# Altium PCB Pow_Dist_24_12_5v.PcbDoc
Units mm, origin at the board's own origin, x right, y up, seen from the top; angles counter-clockwise.
Board outline 255.4 x 262.89 mm, 2 copper layers (Top Layer, Bottom Layer); 118 components, 61 nets, 248 pads, 0 vias.
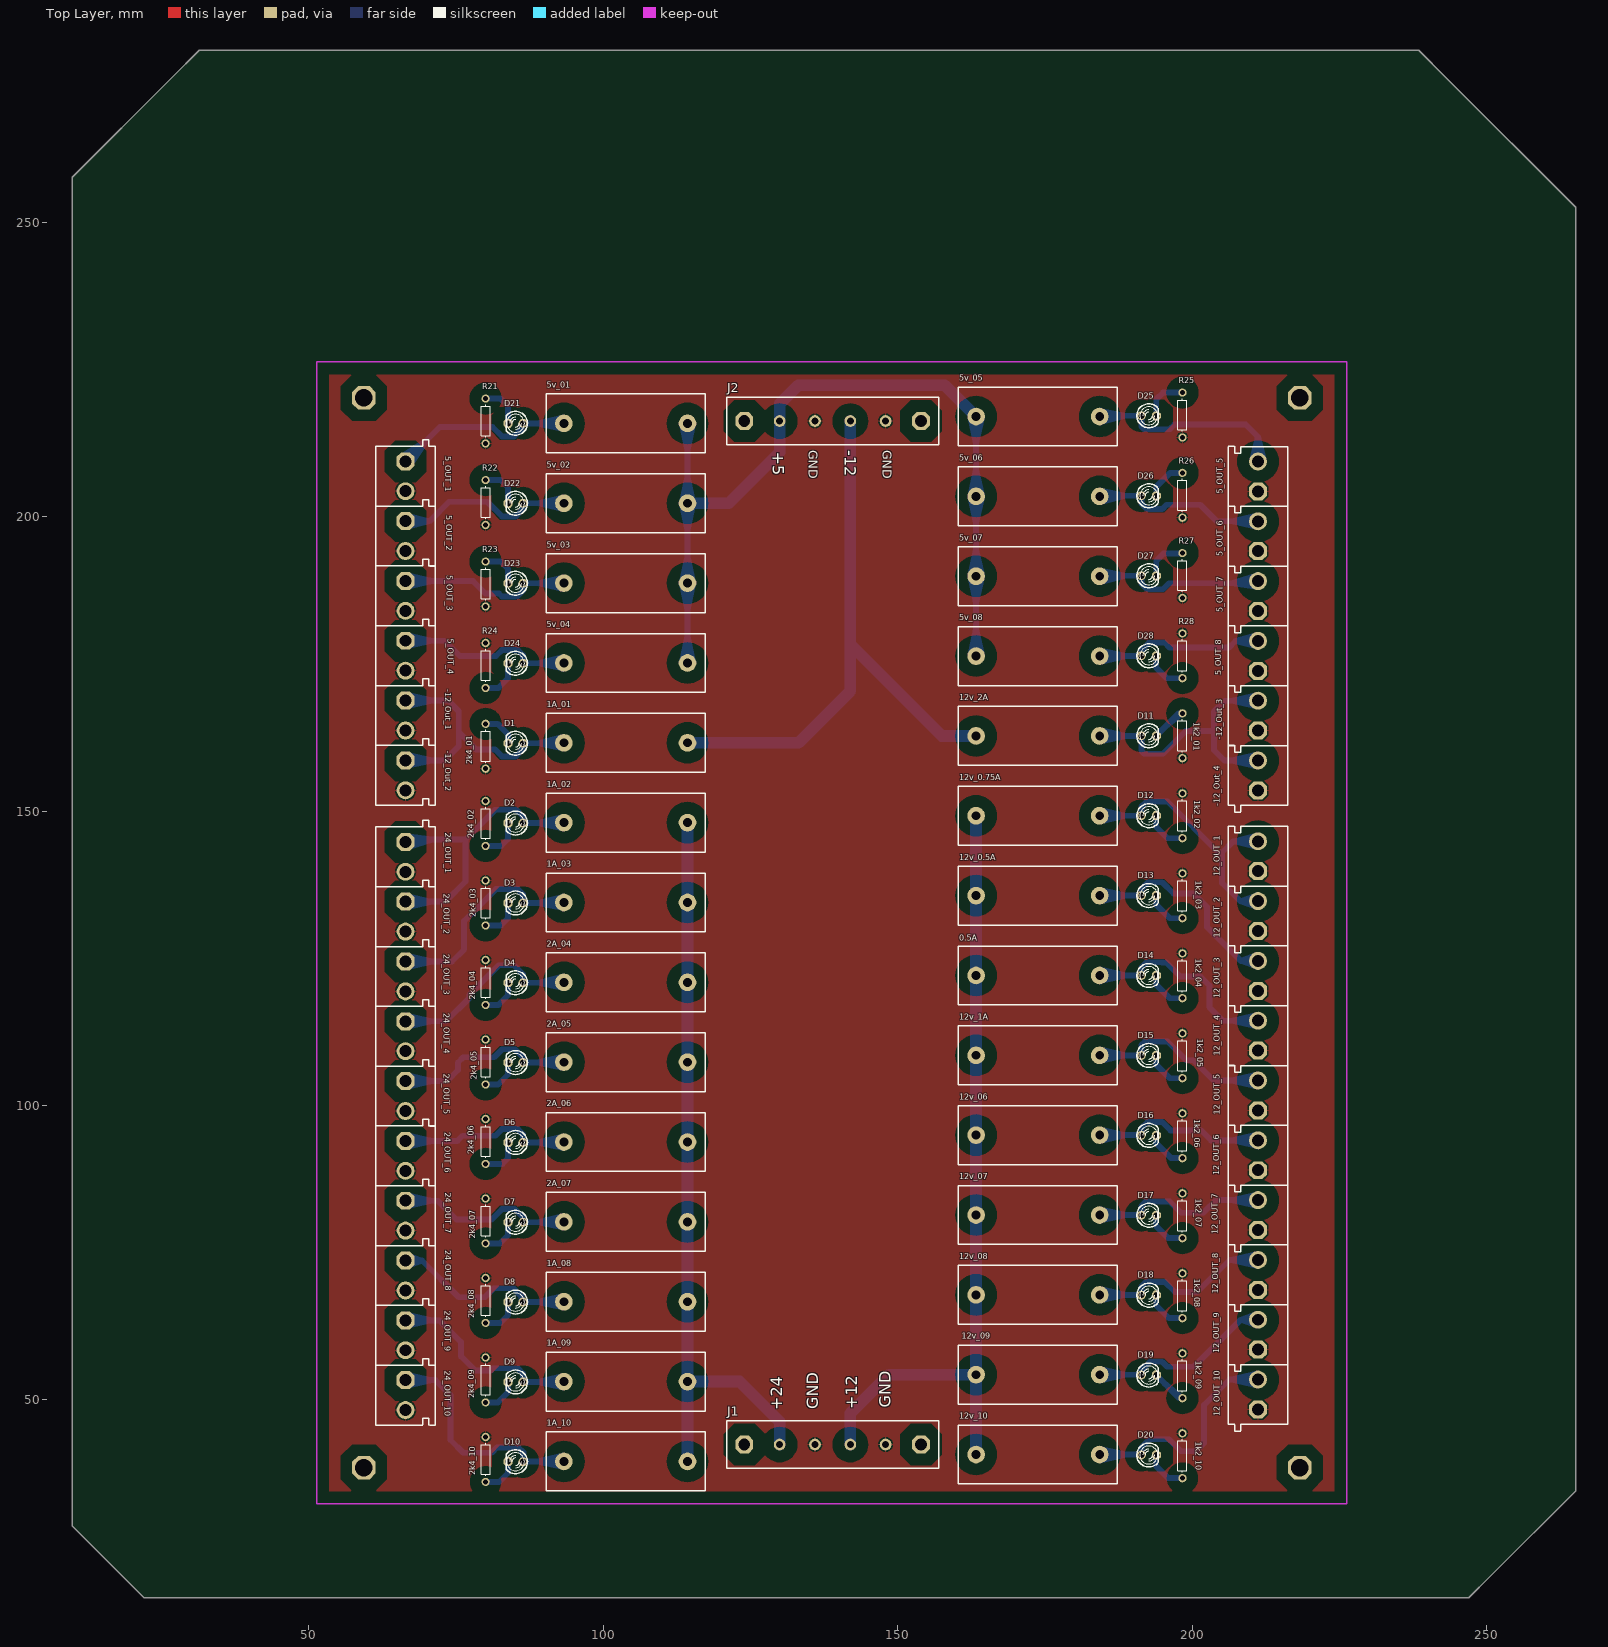
[diagram p0: Top Layer view]
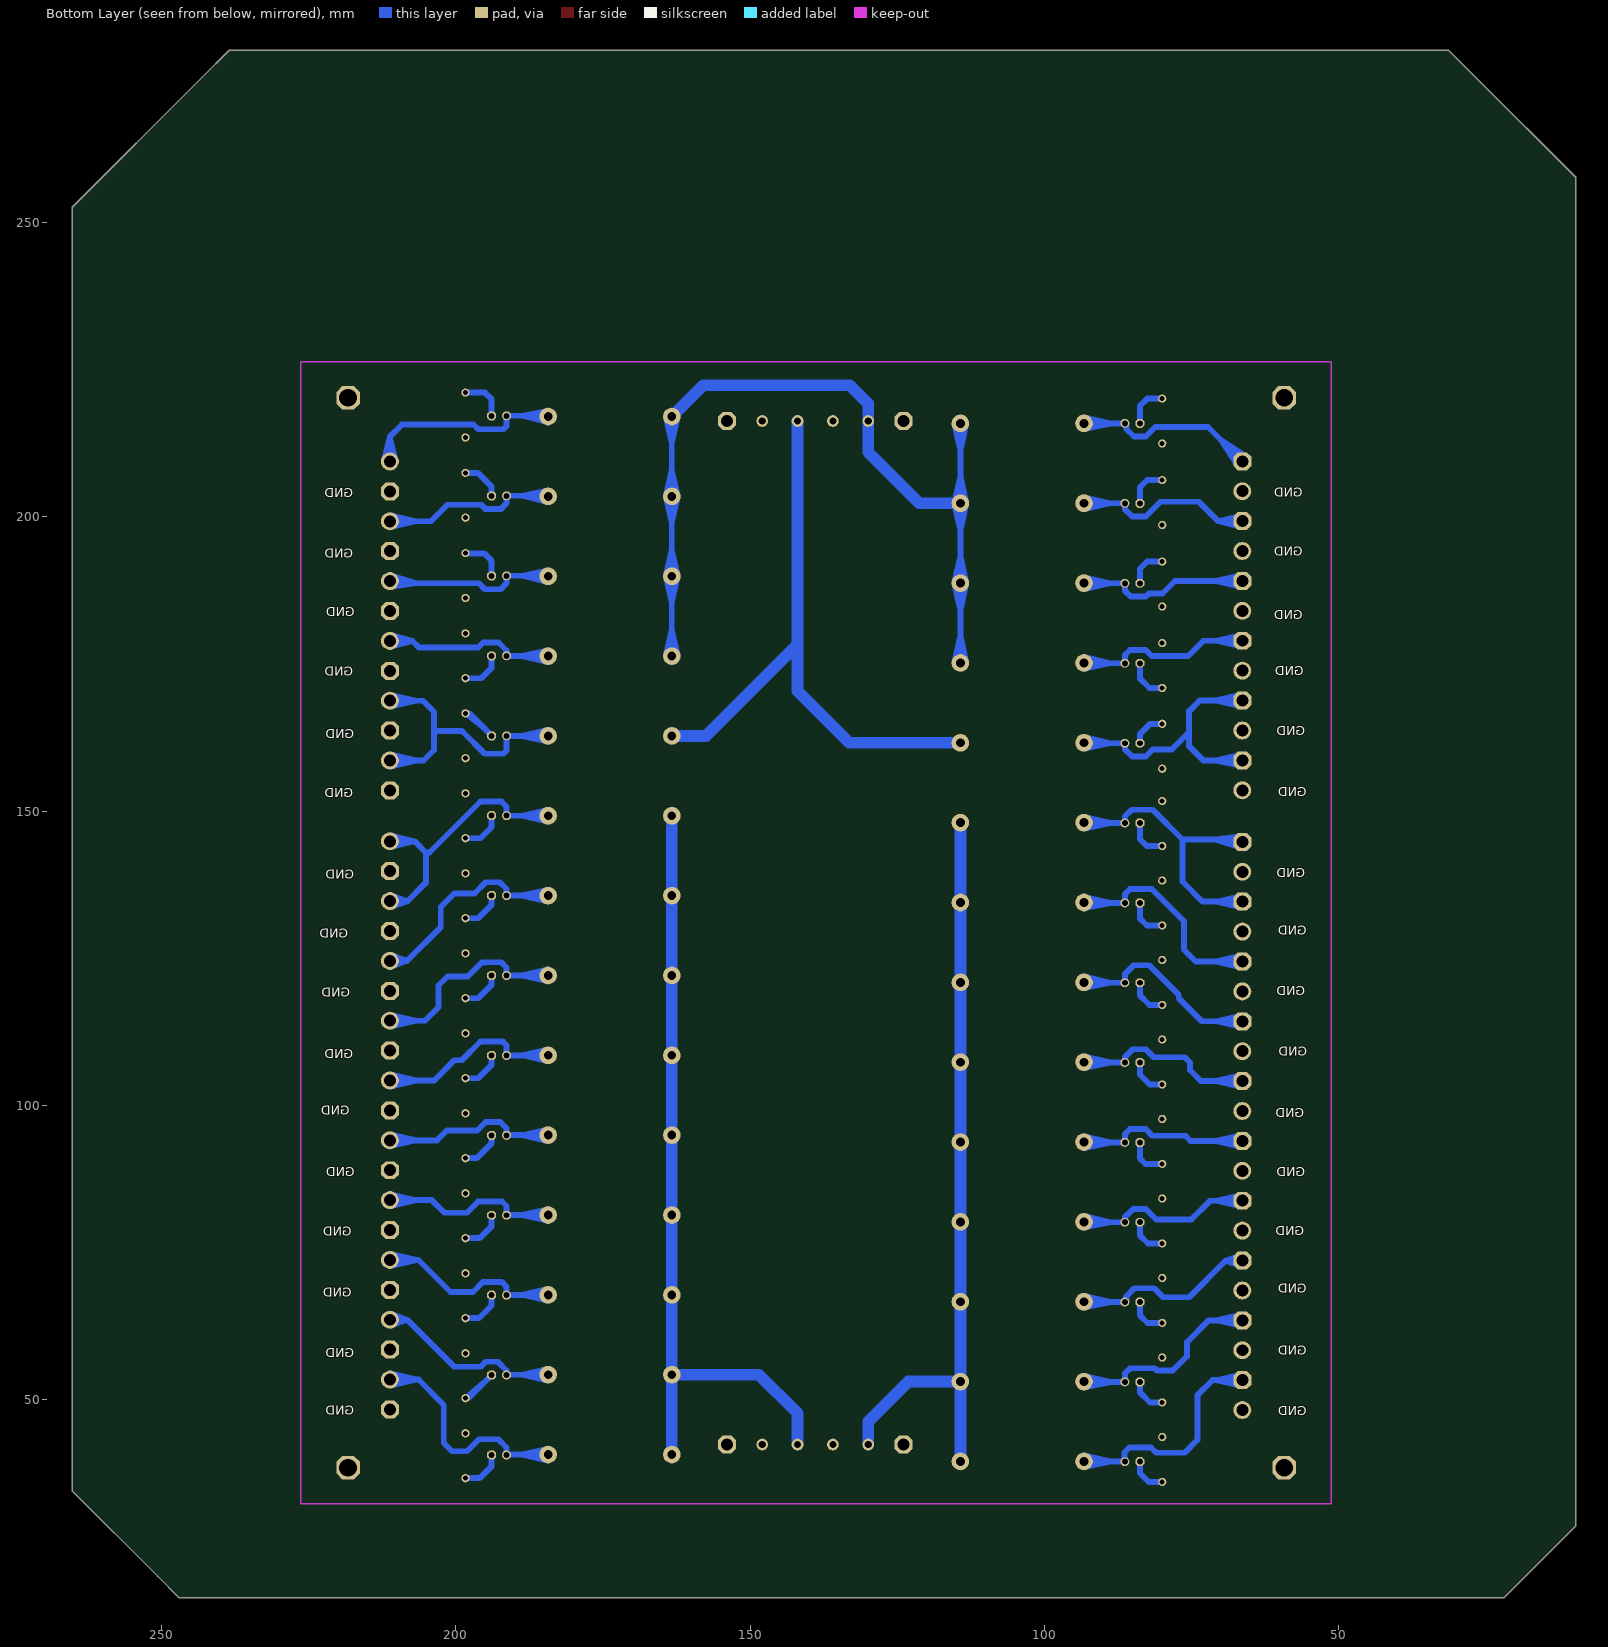
[diagram p1: Bottom Layer view, seen from below]

## Layer stack, top to bottom
Top Solder: solder mask 0.0102, Solder Resist, Dk 3.5
Top Layer: signal copper 0.0356
Dielectric 1: dielectric 0.32, FR-4, Dk 4.8
Bottom Layer: signal copper 0.0356
Bottom Solder: solder mask 0.0102, Solder Resist, Dk 3.5

## Board outline
21.971,16.383 9.779,28.575 9.779,33.147 9.779,257.683 26.67,274.574 31.369,279.273 223.139,279.273 238.506,279.273 243.205,274.574 265.176,252.603 265.176,59.817 265.176,34.544 250.698,20.066 247.015,16.383 22.86,16.383

## Design rules (kind name [scope] priority, off if disabled: settings)
Clearance [All] p1: gap=1
PolygonConnect [All] p1: connectstyle=Relief reliefconductorwidth=0.254 reliefentries=4 polygonreliefangle="90 Angle" airgapwidth=0.254
RoutingVias [All] p1: holewidth=0.711 width=1.27 viastyle="Through Hole" minholewidth=0.711 minwidth=1.27 maxholewidth=0.711 maxwidth=1.27
SolderMaskExpansion [All] p1: expansion=0.102
Width [All] p1: maxlimit=2 minlimit=1 preferedwidth=1 minimp=50.000000 maximp=50.000000 favimp=50.000000
29 further rules are at their usual default settings.

## Components (designator, comment, footprint, x,y, rotation, side; value= is the part's Value field where it differs from the comment)
0.5A "Fuse 2" PCBComponent_1 163.322,122.098 r0 top
1A_01 "Fuse 2" PCBComponent_1 114.3,161.621 r180 top
1A_02 "Fuse 2" PCBComponent_1 114.3,148.058 r180 top
1A_03 "Fuse 2" PCBComponent_1 114.3,134.494 r180 top
1A_08 "Fuse 2" PCBComponent_1 114.3,66.675 r180 top
1A_09 "Fuse 2" PCBComponent_1 114.3,53.111 r180 top
1A_10 "Fuse 2" PCBComponent_1 114.3,39.547 r180 top
1k2_01 "Res1" AXIAL-0.3 198.374,162.814 r270 top
1k2_02 "Res1" AXIAL-0.3 198.374,149.225 r90 top
1k2_03 "Res1" AXIAL-0.3 198.374,135.636 r90 top
1k2_04 "Res1" AXIAL-0.3 198.374,122.047 r90 top
1k2_05 "Res1" AXIAL-0.3 198.374,108.458 r90 top
1k2_06 "Res1" AXIAL-0.3 198.374,94.869 r90 top
1k2_07 "Res1" AXIAL-0.3 198.374,81.28 r90 top
1k2_08 "Res1" AXIAL-0.3 198.374,67.691 r90 top
1k2_09 "Res1" AXIAL-0.3 198.374,54.102 r90 top
1k2_10 "Res1" AXIAL-0.3 198.374,40.513 r90 top
2A_04 "Fuse 2" PCBComponent_1 114.3,120.93 r180 top
2A_05 "Fuse 2" PCBComponent_1 114.3,107.366 r180 top
2A_06 "Fuse 2" PCBComponent_1 114.3,93.803 r180 top
2A_07 "Fuse 2" PCBComponent_1 114.3,80.239 r180 top
2k4_01 "Res1" AXIAL-0.3 80.01,161.036 r270 top
2k4_02 "Res1" AXIAL-0.3 80.01,147.913 r90 top
2k4_03 "Res1" AXIAL-0.3 80.01,134.408 r90 top
2k4_04 "Res1" AXIAL-0.3 80.01,120.904 r90 top
2k4_05 "Res1" AXIAL-0.3 80.01,107.4 r90 top
2k4_06 "Res1" AXIAL-0.3 80.01,93.895 r90 top
2k4_07 "Res1" AXIAL-0.3 80.01,80.391 r90 top
2k4_08 "Res1" AXIAL-0.3 80.01,66.887 r90 top
2k4_09 "Res1" AXIAL-0.3 80.01,53.382 r90 top
2k4_10 "Res1" AXIAL-0.3 80.01,39.878 r90 top
5_OUT_1 "CON2 pin blue" My_CN2 71.501,211.963 r270 top
5_OUT_2 "CON2 pin blue" My_CN2 71.501,201.803 r270 top
5_OUT_3 "CON2 pin blue" My_CN2 71.501,191.643 r270 top
5_OUT_4 "CON2 pin blue" My_CN2 71.501,181.483 r270 top
5_OUT_5 "CON2 pin blue" My_CN2 206.121,201.803 r90 top
5_OUT_6 "CON2 pin blue" My_CN2 206.121,191.643 r90 top
5_OUT_7 "CON2 pin blue" My_CN2 206.121,181.483 r90 top
5_OUT_8 "CON2 pin blue" My_CN2 206.121,171.323 r90 top
5v_01 "Fuse 2" PCBComponent_1 114.3,215.877 r180 top
5v_02 "Fuse 2" PCBComponent_1 114.3,202.313 r180 top
5v_03 "Fuse 2" PCBComponent_1 114.3,188.749 r180 top
5v_04 "Fuse 2" PCBComponent_1 114.3,175.185 r180 top
5v_05 "Fuse 2" PCBComponent_1 163.322,217.045 r0 top
5v_06 "Fuse 2" PCBComponent_1 163.322,203.481 r0 top
5v_07 "Fuse 2" PCBComponent_1 163.322,189.917 r0 top
5v_08 "Fuse 2" PCBComponent_1 163.322,176.353 r0 top
12_OUT_1 "CON2 pin blue" My_CN2 206.121,137.287 r90 top
12_OUT_2 "CON2 pin blue" My_CN2 206.121,127.127 r90 top
12_OUT_3 "CON2 pin blue" My_CN2 206.121,116.967 r90 top
12_OUT_4 "CON2 pin blue" My_CN2 206.121,106.807 r90 top
12_OUT_5 "CON2 pin blue" My_CN2 206.121,96.647 r90 top
12_OUT_6 "CON2 pin blue" My_CN2 206.121,86.487 r90 top
12_OUT_7 "CON2 pin blue" My_CN2 206.121,76.327 r90 top
12_OUT_8 "CON2 pin blue" My_CN2 206.121,66.167 r90 top
12_OUT_9 "CON2 pin blue" My_CN2 206.121,56.007 r90 top
12_OUT_10 "CON2 pin blue" My_CN2 206.121,45.847 r90 top
12v_0.5A "Fuse 2" PCBComponent_1 163.322,135.662 r0 top
12v_0.75A "Fuse 2" PCBComponent_1 163.322,149.226 r0 top
12v_1A "Fuse 2" PCBComponent_1 163.322,108.535 r0 top
12v_2A "Fuse 2" PCBComponent_1 163.322,162.79 r0 top
12v_06 "Fuse 2" PCBComponent_1 163.322,94.971 r0 top
12v_07 "Fuse 2" PCBComponent_1 163.322,81.407 r0 top
12v_08 "Fuse 2" PCBComponent_1 163.322,67.843 r0 top
12v_09 "Fuse 2" PCBComponent_1 163.322,54.279 r0 top
12v_10 "Fuse 2" PCBComponent_1 163.322,40.716 r0 top
24_OUT_1 "CON2 pin blue" My_CN2 71.501,147.32 r270 top
24_OUT_2 "CON2 pin blue" My_CN2 71.501,137.16 r270 top
24_OUT_3 "CON2 pin blue" My_CN2 71.501,127 r270 top
24_OUT_4 "CON2 pin blue" My_CN2 71.501,116.84 r270 top
24_OUT_5 "CON2 pin blue" My_CN2 71.501,106.68 r270 top
24_OUT_6 "CON2 pin blue" My_CN2 71.501,96.52 r270 top
24_OUT_7 "CON2 pin blue" My_CN2 71.501,86.36 r270 top
24_OUT_8 "CON2 pin blue" My_CN2 71.501,76.2 r270 top
24_OUT_9 "CON2 pin blue" My_CN2 71.501,66.04 r270 top
24_OUT_10 "CON2 pin blue" My_CN2 71.501,55.88 r270 top
-12_Out_1 "CON2 pin blue" My_CN2 71.501,171.323 r270 top
-12_Out_2 "CON2 pin blue" My_CN2 71.501,161.163 r270 top
-12_Out_3 "CON2 pin blue" My_CN2 206.121,161.163 r90 top
-12_Out_4 "CON2 pin blue" My_CN2 206.121,151.003 r90 top
D1 "LED" My_LED3MM 85.09,161.544 r180 top
D2 "LED" My_LED3MM 85.09,147.983 r180 top
D3 "LED" My_LED3MM 85.09,134.422 r180 top
D4 "LED" My_LED3MM 85.09,120.862 r180 top
D5 "LED" My_LED3MM 85.09,107.301 r180 top
D6 "LED" My_LED3MM 85.09,93.74 r180 top
D7 "LED" My_LED3MM 85.09,80.179 r180 top
D8 "LED" My_LED3MM 85.09,66.619 r180 top
D9 "LED" My_LED3MM 85.09,53.058 r180 top
D10 "LED" My_LED3MM 85.09,39.497 r180 top
D11 "LED" My_LED3MM 192.659,162.814 r0 top
D12 "LED" My_LED3MM 192.659,149.239 r0 top
D13 "LED" My_LED3MM 192.659,135.664 r0 top
D14 "LED" My_LED3MM 192.659,122.089 r0 top
D15 "LED" My_LED3MM 192.659,108.514 r0 top
D16 "LED" My_LED3MM 192.659,94.94 r0 top
D17 "LED" My_LED3MM 192.659,81.365 r0 top
D18 "LED" My_LED3MM 192.659,67.79 r0 top
D19 "LED" My_LED3MM 192.659,54.215 r0 top
D20 "LED" My_LED3MM 192.659,40.64 r0 top
D21 "LED" My_LED3MM 85.09,215.9 r180 top
D22 "LED" My_LED3MM 85.09,202.311 r180 top
D23 "LED" My_LED3MM 85.09,188.722 r180 top
D24 "LED" My_LED3MM 85.09,175.133 r180 top
D25 "LED" My_LED3MM 192.659,217.17 r0 top
D26 "LED" My_LED3MM 192.659,203.581 r0 top
D27 "LED" My_LED3MM 192.659,189.992 r0 top
D28 "LED" My_LED3MM 192.659,176.403 r0 top
J1 "conn_4pin" conn_4pin 147.955,42.418 r180 top
J2 "conn_4pin" conn_4pin 147.955,216.281 r180 top
R21 "Res1" AXIAL-0.3 80.01,216.281 r270 top
R22 "Res1" AXIAL-0.3 80.01,202.438 r270 top
R23 "Res1" AXIAL-0.3 80.01,188.595 r270 top
R24 "Res1" AXIAL-0.3 80.01,174.752 r90 top
R25 "Res1" AXIAL-0.3 198.374,217.297 r270 top
R26 "Res1" AXIAL-0.3 198.374,203.666 r270 top
R27 "Res1" AXIAL-0.3 198.374,190.034 r270 top
R28 "Res1" AXIAL-0.3 198.374,176.403 r90 top

## Footprints (in the part's own frame and the unit in brackets; to place one, negate y for a bottom-side part, rotate by r counter-clockwise, add the part's x,y. Pads: shape width x height; smd on the part's side, far side on the other; paste and mask are expansions set on the pad)
AXIAL-0.3 [mm] "Axial Device, Thru-Hole; 2 Leads; 0.3 in Pin Spacing"
  round 1.4 hole 0.85: 1(-3.81,0) 2(3.81,0)
  silkscreen extent -2.77,-0.76 2.77,0.76
conn_4pin [mm]
  oct 3x3 hole 2: 0(-6,0) 5(24,0)
  round 2 hole 1.2: 1(0,0) 2(6,0) 3(12,0) 4(18,0)
  silkscreen extent -9,-4 27,4
My_CN2 [mil]
  oct 120x120 hole 80: 1(99.5,-200.5)
  round 120 hole 80: 2(299.5,-200.5)
  silkscreen extent -45,-400 400,0
My_LED3MM [mil]
  round 60 hole 40: A(-50,0)
  oct 60x60 hole 40: K(50,0)
  silkscreen extent -80,-80 62,80
PCBComponent_1 [mm]
  round 3 hole 1.5: 1(0,0) 2(21,0)
  silkscreen extent -3,-5 24,5

## Part data
0.5A 1A_01 1A_02 1A_03 1A_08 1A_09 1A_10 2A_04 2A_05 2A_06 2A_07 5v_01 5v_02 5v_03 5v_04 5v_05 5v_06 5v_07 5v_08 12v_0.5A 12v_0.75A 12v_1A 12v_2A 12v_06 12v_07 12v_08 12v_09 12v_10: "Fuse"
1k2_01 1k2_02 1k2_03 1k2_04 1k2_05 1k2_06 1k2_07 1k2_08 1k2_09 1k2_10 2k4_01 2k4_02 2k4_03 2k4_04 2k4_05 2k4_06 2k4_07 2k4_08 2k4_09 2k4_10 R21 R22 R23 R24 R25 R26 R27 R28: "Resistor"
5_OUT_1 5_OUT_2 5_OUT_3 5_OUT_4 5_OUT_5 5_OUT_6 5_OUT_7 5_OUT_8 12_OUT_1 12_OUT_2 12_OUT_3 12_OUT_4 12_OUT_5 12_OUT_6 12_OUT_7 12_OUT_8 12_OUT_9 12_OUT_10 24_OUT_1 24_OUT_2 24_OUT_3 24_OUT_4 24_OUT_5 24_OUT_6 24_OUT_7 24_OUT_8 24_OUT_9 24_OUT_10 -12_Out_1 -12_Out_2 -12_Out_3 -12_Out_4: "Connector blue screw"
D1 D2 D3 D4 D5 D6 D7 D8 D9 D10 D11 D12 D13 D14 D15 D16 D17 D18 D19 D20 D21 D22 D23 D24 D25 D26 D27 D28: "Typical INFRARED GaAs LED"

## Free pads (board coordinates)
  oct 4x4 hole 3: 3(59.309,38.481) 3(59.309,220.218) 3(218.313,38.481) 3(218.313,220.218)

## Nets (pads, with @x,y where several pads share a name; then routed paths per layer and width w, separated by ;. In a path a pad name is that pad's centre, name@x,y a point inside that pad or via, vN(x,y) a via of type N, cw(c..) or ccw(c..) an arc to the next point about the centre after c; other vN are vias at no path point)
GND: 1k2_01.2 1k2_02.2 1k2_03.2 1k2_04.2 1k2_05.2 1k2_06.2 1k2_07.2 1k2_08.2 1k2_09.2 1k2_10.2 2k4_01.2 2k4_02.2 2k4_03.2 2k4_04.2 2k4_05.2 2k4_06.2 2k4_07.2 2k4_08.2 2k4_09.2 2k4_10.2 5_OUT_1.2 5_OUT_2.2 5_OUT_3.2 5_OUT_4.2 5_OUT_5.1 5_OUT_6.1 5_OUT_7.1 5_OUT_8.1 12_OUT_1.1 12_OUT_2.1 12_OUT_3.1 12_OUT_4.1 12_OUT_5.1 12_OUT_6.1 12_OUT_7.1 12_OUT_8.1 12_OUT_9.1 12_OUT_10.1 24_OUT_1.2 24_OUT_2.2 24_OUT_3.2 24_OUT_4.2 24_OUT_5.2 24_OUT_6.2 24_OUT_7.2 24_OUT_8.2 24_OUT_9.2 24_OUT_10.2 -12_Out_1.2 -12_Out_2.2 -12_Out_3.1 -12_Out_4.1 J1.1 J1.3 J2.1 J2.3 R21.2 R22.2 R23.2 R24.2 R25.2 R26.2 R27.2 R28.2
Net0.5A_1: 0.5A.1 12v_0.5A.1 12v_0.75A.1 12v_1A.1 12v_06.1 12v_07.1 12v_08.1 12v_09.1 12v_10.1 J1.2 | length 137.9
  Bottom Layer w2: J1.2 141.955,47.721 148.513,54.279 12v_09.1 ; 12v_10.1 12v_09.1 ; 12v_0.75A.1 12v_0.5A.1 0.5A.1 12v_1A.1 12v_06.1 12v_07.1 12v_08.1 12v_09.1
Net0.5A_2: 0.5A.2 12_OUT_4.2 D14.A | length 56.7
  Bottom Layer w1: 0.5A.2 191.38,122.098 D14.A ; 0.5A.2@184.433,121.105 188.822,122.098 0.5A.2@184.433,123.092 ; 187.627,122.098 D14.A ; 12_OUT_4.2@211.098,113.397 206.69,114.414 12_OUT_4.2@211.098,115.432 ; 12_OUT_4.2 205.245,114.414 202.946,116.713 202.946,120.396 201.422,121.92 197.993,121.92 195.58,124.333 194.95,124.333 194.931,124.351 192.296,124.351 191.389,123.444 D14.A
Net1A_01_1: 1A_01.1 12v_2A.1 J2.2 | length 105
  Bottom Layer w2: 1A_01.1 133.173,161.621 141.955,170.403 141.955,178.339 ; J2.2 141.955,178.339 ; 12v_2A.1 157.504,162.79 141.955,178.339
Net1A_02_1: 1A_02.1 1A_03.1 1A_08.1 1A_09.1 1A_10.1 2A_04.1 2A_05.1 2A_06.1 2A_07.1 J1.4 | length 130.9
  Bottom Layer w2: 1A_10.1 1A_09.1 ; 1A_02.1 1A_03.1 2A_04.1 2A_05.1 2A_06.1 2A_07.1 1A_08.1 1A_09.1 ; J1.4 129.955,46.321 123.165,53.111 1A_09.1
Net1A_02_2: 1A_02.2 24_OUT_1.1 24_OUT_2.1 D2.A | length 86.8
  Bottom Layer w1: 24_OUT_2.1 73.165,134.633 76.581,138.049 76.581,145.182 ; 24_OUT_1.1@66.436,145.816 70.98,145.182 ; 24_OUT_2.1@66.524,133.615 70.932,134.633 24_OUT_2.1@66.524,135.65 ; 24_OUT_1.1@66.609,143.788 70.98,145.182 ; 1A_02.2@93.173,149.05 88.799,147.983 ; 1A_02.2@93.205,147.062 88.799,147.983 ; 1A_02.2@93.226,147.983 D2.A ; 1A_02.2 88.799,147.983 ; 70.98,145.182 24_OUT_1.1 66.798,145.182 76.581,145.182 ; 76.581,145.182 81.644,150.245 85.213,150.245 86.36,149.098 ; D2.A 86.36,149.098 ; D2.A 86.36,149.098
Net1A_03_2: 1A_03.2 24_OUT_3.1 D3.A | length 59.2
  Bottom Layer w1: 24_OUT_3.1 74.308,124.473 76.327,126.492 76.327,131.318 81.788,136.779 85.471,136.779 86.36,135.89 D3.A 93.229,134.422 1A_03.2 88.799,134.422 ; 24_OUT_3.1@66.524,123.455 70.932,124.473 24_OUT_3.1@66.524,125.49 ; 1A_03.2@93.173,135.486 88.799,134.422 ; 1A_03.2@93.205,133.498 88.799,134.422
Net1A_08_2: 1A_08.2 24_OUT_8.1 D8.A | length 52.7
  Bottom Layer w1: 24_OUT_8.1 69.202,73.673 ; 24_OUT_8.1@66.596,72.666 69.202,73.673 ; 24_OUT_8.1@66.596,74.679 69.202,73.673 ; 1A_08.2@93.176,67.667 88.799,66.619 ; 1A_08.2@93.201,65.68 88.799,66.619 ; 69.202,73.673 75.438,67.437 79.862,67.437 81.386,68.961 84.742,68.961 86.082,67.621 ; 86.082,67.621 D8.A ; 86.082,67.621 D8.A ; 86.082,67.621 86.082,66.897 D8.A ; D8.A 93.244,66.619 1A_08.2 88.799,66.619
Net1A_09_2: 1A_09.2 24_OUT_9.1 D9.A | length 56.4
  Bottom Layer w1: 24_OUT_9.1 72.123,63.513 75.819,59.817 75.819,57.404 78.231,54.992 80.921,54.992 81.301,55.372 85.471,55.372 86.36,54.483 D9.A 93.247,53.058 1A_09.2 88.799,53.058 ; 24_OUT_9.1@66.524,62.495 70.932,63.513 24_OUT_9.1@66.524,64.53 ; 1A_09.2@93.177,54.104 88.799,53.058 ; 1A_09.2@93.201,52.116 88.799,53.058
Net1A_10_2: 1A_10.2 24_OUT_10.1 D10.A | length 62.1
  Bottom Layer w1: 24_OUT_10.1 71.488,53.353 74.041,50.8 74.041,43.18 76.2,41.021 81.026,41.021 81.915,41.91 85.598,41.91 86.41,41.098 ; 24_OUT_10.1@66.524,52.335 70.932,53.353 24_OUT_10.1@66.524,54.37 ; 90.123,39.547 D10.A 86.41,41.098 ; 1A_10.2@93.189,38.554 88.8,39.547 1A_10.2@93.189,40.541 ; 1A_10.2 86.41,39.547 86.41,41.098
Net1k2_01_1: 1k2_01.1 D11.K | length 10.1
  Bottom Layer w1: D11.K 197.739,166.624 1k2_01.1 195.191,164.076
Net1k2_02_1: 1k2_02.1 D12.K | length 11.6
  Bottom Layer w1: 193.929,147.32 D12.K 193.929,147.32 ; 193.929,147.32 195.834,145.415 ; 195.834,145.415 1k2_02.1 195.834,145.415
Net1k2_03_1: 1k2_03.1 D13.K | length 10.7
  Bottom Layer w1: 193.929,134.112 D13.K 193.929,134.112 ; 193.929,134.112 196.215,131.826 ; 196.215,131.826 1k2_03.1 196.215,131.826
Net1k2_04_1: 1k2_04.1 D14.K | length 8.5
  Bottom Layer w1: 1k2_04.1 196.215,118.237 193.929,120.523 ; 193.929,120.523 D14.K 193.929,120.523
Net1k2_05_1: 1k2_05.1 D15.K | length 10.7
  Bottom Layer w1: 193.929,106.934 D15.K 193.929,106.934 ; 193.929,106.934 196.215,104.648 ; 196.215,104.648 1k2_05.1 196.215,104.648
Net1k2_06_1: 1k2_06.1 D16.K | length 8.2
  Bottom Layer w1: 1k2_06.1 196.469,91.059 193.929,93.599 ; 193.929,93.599 D16.K 193.929,93.599
Net1k2_07_1: 1k2_07.1 D17.K | length 9
  Bottom Layer w1: 1k2_07.1 195.961,77.47 193.929,79.502 ; 193.929,79.502 D17.K 193.929,79.502
Net1k2_08_1: 1k2_08.1 D18.K | length 11.1
  Bottom Layer w1: 193.929,66.04 D18.K 193.929,66.04 ; 193.929,66.04 196.088,63.881 ; 196.088,63.881 1k2_08.1 196.088,63.881
Net1k2_09_1: 1k2_09.1 D19.K | length 10.1
  Bottom Layer w1: D19.K 197.852,50.292 1k2_09.1 195.276,52.868
Net1k2_10_1: 1k2_10.1 D20.K | length 9.1
  Bottom Layer w1: 1k2_10.1 195.961,36.703 193.929,38.735 ; 193.929,38.735 D20.K 193.929,38.735
Net2A_04_2: 2A_04.2 24_OUT_4.1 D4.A | length 55.8
  Bottom Layer w1: 24_OUT_4.1 73.292,114.313 77.216,118.237 77.216,118.809 82.232,123.825 84.836,123.825 86.36,122.301 D4.A 93.232,120.862 2A_04.2 88.799,120.862 ; 24_OUT_4.1@66.524,113.295 70.932,114.313 24_OUT_4.1@66.524,115.33 ; 2A_04.2@93.174,121.922 88.799,120.862 ; 2A_04.2@93.204,119.935 88.799,120.862
Net2A_05_2: 2A_05.2 24_OUT_5.1 D5.A | length 54.7
  Bottom Layer w1: 24_OUT_5.1 73.419,104.153 75.311,106.045 75.311,107.315 76.2,108.204 81.459,108.204 82.818,109.563 85.001,109.563 86.36,108.204 ; 24_OUT_5.1@66.524,103.135 70.932,104.153 24_OUT_5.1@66.524,105.17 ; 2A_05.2@93.174,108.358 88.799,107.301 ; 2A_05.2@93.203,106.371 88.799,107.301 ; 2A_05.2@93.235,107.301 D5.A ; 2A_05.2 88.799,107.301 ; D5.A 86.36,108.204 ; D5.A 86.36,108.204
Net2A_06_2: 2A_06.2 24_OUT_6.1 D6.A | length 52
  Bottom Layer w1: 24_OUT_6.1 75.197,93.993 76.073,94.869 81.685,94.869 82.818,96.002 85.481,96.002 86.36,95.123 D6.A 93.238,93.74 2A_06.2 88.799,93.74 ; 24_OUT_6.1@66.524,92.975 70.932,93.993 24_OUT_6.1@66.524,95.01 ; 2A_06.2@93.175,94.795 88.799,93.74 ; 2A_06.2@93.203,92.807 88.799,93.74
Net2A_07_2: 2A_07.2 24_OUT_7.1 D7.A | length 53.8
  Bottom Layer w1: 24_OUT_7.1 71.869,83.833 75.057,80.645 81.021,80.645 82.818,82.441 84.945,82.441 86.36,81.026 ; 24_OUT_7.1@66.524,82.815 70.932,83.833 24_OUT_7.1@66.524,84.85 ; 2A_07.2@93.176,81.231 88.799,80.179 ; 2A_07.2@93.202,79.244 88.799,80.179 ; D7.A 86.36,81.026 ; D7.A 93.241,80.179 2A_07.2 88.799,80.179 ; D7.A 86.36,81.026
Net2k4_01_1: 2k4_01.1 D1.K | length 6.1
  Bottom Layer w1: 2k4_01.1 82.042,164.846 83.82,163.068 D1.K
Net2k4_02_1: 2k4_02.1 D2.K | length 9.7
  Bottom Layer w1: 2k4_02.1 82.635,144.103 83.82,145.288 ; 83.82,145.288 D2.K 83.82,145.288
Net2k4_03_1: 2k4_03.1 D3.K | length 9.5
  Bottom Layer w1: 2k4_03.1 82.592,130.598 83.82,131.826 ; 83.82,131.826 D3.K 83.82,131.826
Net2k4_04_1: 2k4_04.1 D4.K | length 8.7
  Bottom Layer w1: 2k4_04.1 82.169,117.094 83.82,118.745 ; 83.82,118.745 D4.K 83.82,118.745
Net2k4_05_1: 2k4_05.1 D5.K | length 8.5
  Bottom Layer w1: 2k4_05.1 82.127,103.59 83.82,105.283 ; 83.82,105.283 D5.K 83.82,105.283
Net2k4_06_1: 2k4_06.1 D6.K | length 9.6
  Bottom Layer w1: 2k4_06.1 82.846,90.085 83.82,91.059 ; 83.82,91.059 D6.K 83.82,91.059
Net2k4_07_1: 2k4_07.1 D7.K | length 8.8
  Bottom Layer w1: 2k4_07.1 82.423,76.581 83.82,77.978 ; 83.82,77.978 D7.K 83.82,77.978
Net2k4_08_1: 2k4_08.1 D8.K | length 8.8
  Bottom Layer w1: 2k4_08.1 82.508,63.077 83.82,64.389 ; 83.82,64.389 D8.K 83.82,64.389
Net2k4_09_1: 2k4_09.1 D9.K | length 8
  Bottom Layer w1: 2k4_09.1 82.084,49.572 83.82,51.308 ; 83.82,51.308 D9.K 83.82,51.308
Net2k4_10_1: 2k4_10.1 D10.K | length 8.3
  Bottom Layer w1: 2k4_10.1 82.296,36.068 83.82,37.592 ; 83.82,37.592 D10.K 83.82,37.592
Net5_OUT_1_1: 5_OUT_1.1 5v_01.2 D21.A | length 53
  Bottom Layer w1: 5_OUT_1.1@65.76,210.228 70.054,213.081 5_OUT_1.1@67.201,208.787 ; 5_OUT_1.1 72.238,215.265 81.191,215.265 82.818,213.638 84.822,213.638 86.082,214.898 ; 5v_01.2@93.189,214.883 88.8,215.877 5v_01.2@93.189,216.87 ; 5v_01.2 D21.A@86.487,215.877 ; 86.082,214.898 D21.A ; 86.082,214.898 D21.A ; 86.082,214.898 86.082,215.622 D21.A ; D21.A@86.487,215.877 86.487,215.773 86.383,215.877 D21.A@86.487,215.877
Net5_OUT_2_1: 5_OUT_2.1 5v_02.2 D22.A | length 53.5
  Bottom Layer w1: 5_OUT_2.1 70.498,199.276 ; 5_OUT_2.1@66.537,198.26 70.498,199.276 ; 5_OUT_2.1@66.537,200.292 70.498,199.276 ; 5v_02.2@93.189,201.319 88.8,202.311 ; 5v_02.2@93.188,203.307 88.8,202.311 ; 5v_02.2@93.298,202.311 D22.A ; 5v_02.2 88.8,202.311 ; 70.498,199.276 73.787,202.565 80.302,202.565 82.818,200.049 85.114,200.049 86.36,201.295 ; 86.36,201.295 D22.A ; 86.36,201.295 D22.A
Net5_OUT_3_1: 5_OUT_3.1 5v_03.2 D23.A | length 52.2
  Bottom Layer w1: 5_OUT_3.1 77.838,189.116 79.969,186.985 82.293,186.985 82.818,186.46 85.368,186.46 86.36,187.452 D23.A 5v_03.2@93.273,188.722 ; 5_OUT_3.1@66.524,188.098 70.932,189.116 5_OUT_3.1@66.524,190.133 ; 5v_03.2@93.183,189.742 88.8,188.722 ; 5v_03.2@93.195,187.755 88.8,188.722 ; 5v_03.2 88.8,188.722
Net5_OUT_4_1: 5_OUT_4.1 5v_04.2 D24.A | length 52.6
  Bottom Layer w1: 5_OUT_4.1 73.012,178.956 75.606,176.362 81.785,176.362 82.818,177.395 85.495,177.395 86.36,176.53 D24.A 5v_04.2@93.248,175.133 ; 5_OUT_4.1@66.524,177.938 70.932,178.956 5_OUT_4.1@66.524,179.973 ; 5v_04.2@93.177,176.178 88.799,175.133 ; 5v_04.2@93.2,174.19 88.799,175.133 ; 5v_04.2 88.799,175.133
Net5_OUT_5_2: 5_OUT_5.2 5v_05.2 D25.A | length 56
  Bottom Layer w1: 5v_05.2 188.826,217.17 ; 5v_05.2@184.405,218.041 188.826,217.17 ; 5v_05.2@184.447,217.17 D25.A 191.389,215.392 191.897,214.884 196.215,214.884 197.018,215.687 209.128,215.687 211.214,213.601 ; 5v_05.2@184.461,216.054 188.826,217.17 ; 5_OUT_5.2@210.197,209.535 211.214,213.601 ; 5_OUT_5.2 211.214,213.601 ; 5_OUT_5.2@212.23,209.535 211.214,213.601
Net5_OUT_6_2: 5_OUT_6.2 5v_06.2 D26.A | length 52.6
  Bottom Layer w1: 5v_06.2@184.411,204.477 188.824,203.581 ; 5v_06.2@184.455,202.49 188.824,203.581 ; 5_OUT_6.2@211.098,198.233 206.69,199.25 5_OUT_6.2@211.098,200.268 ; 5_OUT_6.2 204.229,199.25 201.423,202.056 195.668,202.056 194.931,201.319 192.381,201.319 191.389,202.311 D26.A 184.422,203.581 5v_06.2 188.824,203.581
Net5_OUT_7_2: 5_OUT_7.2 5v_07.2 D27.A | length 56.3
  Bottom Layer w1: 5v_07.2 188.823,189.992 ; 5v_07.2@184.397,189.992 D27.A 191.389,188.722 192.405,187.706 195.072,187.706 196.088,188.722 210.845,188.722 5_OUT_7.2 206.643,188.722 ; 5v_07.2@184.417,190.913 188.823,189.992 ; 5v_07.2@184.45,188.925 188.823,189.992 ; 5_OUT_7.2@211.018,190.095 206.643,188.722 ; 5_OUT_7.2@211.181,188.067 206.643,188.722
Net5_OUT_8_2: 5_OUT_8.2 5v_08.2 D28.A | length 50.5
  Bottom Layer w1: 5v_08.2 D28.A@191.339,176.353 ; 5v_08.2@184.433,175.36 188.822,176.353 5v_08.2@184.433,177.347 ; 187.626,176.353 D28.A ; 5_OUT_8.2@211.077,177.915 207.378,178.93 ; 5_OUT_8.2@211.077,179.945 207.378,178.93 ; 5_OUT_8.2 207.378,178.93 ; D28.A 191.389,177.292 ; D28.A 191.389,177.292 ; 191.389,177.292 192.762,178.665 195.35,178.665 196.228,177.787 206.235,177.787 207.378,178.93
Net5v_01_1: 5v_01.1 5v_02.1 5v_03.1 5v_04.1 5v_05.1 5v_06.1 5v_07.1 5v_08.1 J2.4 | length 253.8
  Bottom Layer w1: 5v_04.1@113.306,175.296 114.3,179.685 5v_04.1@115.294,175.296 ; 5v_03.1@113.306,188.638 114.3,184.249 5v_03.1@115.294,188.638 ; 5v_03.1@113.306,188.86 114.3,193.249 5v_03.1@115.294,188.86 ; 5v_02.1@113.306,202.202 114.3,197.813 5v_02.1@115.294,202.202 ; 5v_02.1@113.306,202.424 114.3,206.813 5v_02.1@115.294,202.424 ; 5v_01.1@113.306,215.765 114.3,211.377 5v_01.1@115.294,215.765 ; 5v_04.1 5v_03.1 5v_02.1 5v_01.1 ; 5v_08.1@162.328,176.465 163.322,180.853 5v_08.1@164.316,176.465 ; 5v_07.1@162.328,189.806 163.322,185.417 5v_07.1@164.316,189.806 ; 5v_07.1@162.328,190.028 163.322,194.417 5v_07.1@164.316,190.028 ; 5v_06.1@162.328,203.37 163.322,198.981 5v_06.1@164.316,203.37 ; 5v_06.1@162.328,203.592 163.322,207.981 5v_06.1@164.316,203.592 ; 5v_05.1@162.328,216.934 163.322,212.545 5v_05.1@164.316,216.934 ; 5v_08.1 5v_07.1 5v_06.1 5v_05.1
  Bottom Layer w2: 5v_02.1 121.287,202.313 129.955,210.981 J2.4 129.955,219.236 133.096,222.377 157.99,222.377 5v_05.1
Net12_OUT_1_2: 12_OUT_1.2 12_OUT_2.2 12v_0.75A.2 D12.A | length 72.9
  Bottom Layer w1: 12v_0.75A.2 D12.A@191.376,149.226 ; 12v_0.75A.2@184.433,148.232 188.822,149.226 12v_0.75A.2@184.433,150.22 ; 187.627,149.226 D12.A 191.389,150.749 192.278,151.638 195.834,151.638 204.47,143.002 205.105,143.002 ; 12_OUT_2.2@211.04,133.725 208.2,134.734 ; 12_OUT_2.2@211.04,135.743 208.2,134.734 ; 12_OUT_1.2@211.089,143.878 206.997,144.894 ; 12_OUT_1.2@211.089,145.911 206.997,144.894 ; 12_OUT_2.2 208.2,134.734 ; 12_OUT_1.2 206.997,144.894 ; 205.105,143.002 206.997,144.894 ; 205.105,143.002 205.105,137.829 208.2,134.734
Net12_OUT_3_2: 12_OUT_3.2 12v_0.5A.2 D13.A | length 55.7
  Bottom Layer w1: 12v_0.5A.2 D13.A@191.387,135.662 ; 12v_0.5A.2@184.433,134.668 188.822,135.662 12v_0.5A.2@184.433,136.656 ; 187.627,135.662 D13.A ; 12_OUT_3.2@211.034,123.566 208.293,124.574 ; 12_OUT_3.2@211.034,125.582 208.293,124.574 ; 12_OUT_3.2 208.293,124.574 ; D13.A 191.389,136.779 ; D13.A 191.389,136.779 ; 191.389,136.779 192.536,137.926 194.931,137.926 196.841,136.017 200.279,136.017 202.565,133.731 202.565,130.302 208.293,124.574
Net12_OUT_5_2: 12_OUT_5.2 12v_1A.2 D15.A | length 53.4
  Bottom Layer w1: 12v_1A.2 D15.A@191.369,108.535 ; 12v_1A.2@184.433,107.541 188.822,108.535 12v_1A.2@184.433,109.528 ; 187.627,108.535 D15.A 191.389,110.236 192.024,110.871 195.834,110.871 199.009,107.696 200.254,107.696 203.695,104.254 12_OUT_5.2 ; 12_OUT_5.2@211.098,103.237 206.69,104.254 12_OUT_5.2@211.098,105.272
Net12_OUT_6_2: 12_OUT_6.2 12v_06.2 D16.A | length 52.8
  Bottom Layer w1: 12v_06.2 D16.A@191.358,94.971 ; 12v_06.2@184.433,93.977 188.822,94.971 12v_06.2@184.433,95.965 ; 187.626,94.971 D16.A ; 12_OUT_6.2@211.098,93.077 206.69,94.094 12_OUT_6.2@211.098,95.112 ; 12_OUT_6.2 203.213,94.094 201.549,95.758 196.375,95.758 194.931,97.202 192.452,97.202 191.389,96.139 ; D16.A 191.389,96.139 ; D16.A 191.389,96.139
Net12_OUT_7_2: 12_OUT_7.2 12v_07.2 D17.A | length 52.3
  Bottom Layer w1: 12v_07.2 191.347,81.407 D17.A ; 12v_07.2@184.433,80.413 188.822,81.407 12v_07.2@184.433,82.401 ; 187.626,81.407 D17.A ; 12_OUT_7.2@211.098,82.917 206.69,83.934 12_OUT_7.2@211.098,84.952 ; 12_OUT_7.2 204.076,83.934 201.93,81.788 198.12,81.788 196.215,83.693 192.151,83.693 191.389,82.931 D17.A
Net12_OUT_8_2: 12_OUT_8.2 12v_08.2 D18.A | length 53.4
  Bottom Layer w1: 12v_08.2 D18.A@191.336,67.843 ; 12v_08.2@184.433,66.849 188.822,67.843 12v_08.2@184.433,68.837 ; 187.625,67.843 D18.A 191.389,69.215 192.226,70.052 195.378,70.052 197.104,68.326 200.914,68.326 206.362,73.774 12_OUT_8.2 ; 12_OUT_8.2@211.098,72.757 206.69,73.774 12_OUT_8.2@211.098,74.792
Net12_OUT_9_2: 12_OUT_9.2 12v_09.2 D19.A | length 51.3
  Bottom Layer w1: 12v_09.2 D19.A@191.324,54.279 ; 12v_09.2@184.433,53.286 188.822,54.279 12v_09.2@184.433,55.273 ; 187.625,54.279 D19.A ; 12_OUT_9.2@211.036,62.606 208.267,63.614 ; 12_OUT_9.2@211.036,64.623 208.267,63.614 ; 12_OUT_9.2 208.267,63.614 ; D19.A 191.389,54.991 ; D19.A 191.389,54.991 ; 191.389,54.991 192.875,56.477 194.931,56.477 195.782,55.626 200.279,55.626 208.267,63.614
Net12_OUT_10_2: 12_OUT_10.2 12v_10.2 D20.A | length 60.2
  Bottom Layer w1: 12v_10.2 D20.A@191.313,40.716 ; 12v_10.2@184.433,39.722 188.822,40.716 12v_10.2@184.433,41.709 ; 187.624,40.716 D20.A 191.389,41.91 192.786,43.307 196.088,43.307 198.12,41.275 200.66,41.275 202.057,42.672 202.057,49.149 206.362,53.454 12_OUT_10.2 ; 12_OUT_10.2@211.098,52.437 206.69,53.454 12_OUT_10.2@211.098,54.472
Net-12_Out_1_1: 1A_01.2 -12_Out_1.1 -12_Out_2.1 D1.A | length 79.4
  Bottom Layer w1: -12_Out_2.1 73.038,158.636 75.438,161.036 75.438,167.005 73.647,168.796 -12_Out_1.1 ; -12_Out_2.1@66.524,157.618 70.932,158.636 -12_Out_2.1@66.524,159.653 ; -12_Out_1.1@66.524,167.778 70.932,168.796 -12_Out_1.1@66.524,169.813 ; 75.438,163.449 78.404,160.483 81.616,160.483 82.818,159.282 85.114,159.282 86.36,160.528 ; 1A_01.2@93.172,162.613 88.799,161.544 ; 1A_01.2@93.206,160.626 88.799,161.544 ; 1A_01.2@93.222,161.544 D1.A ; 1A_01.2 88.799,161.544 ; 86.36,160.528 D1.A ; 86.36,160.528 D1.A
Net-12_Out_3_2: 12v_2A.2 -12_Out_3.2 -12_Out_4.2 D11.A | length 77.6
  Bottom Layer w1: 12v_2A.2 D11.A@191.365,162.79 ; 12v_2A.2@184.433,161.796 188.822,162.79 12v_2A.2@184.433,163.784 ; 187.627,162.79 D11.A 191.389,160.274 191.897,159.766 195.072,159.766 198.945,163.639 203.708,163.639 ; -12_Out_4.2@211.098,157.593 206.69,158.61 -12_Out_4.2@211.098,159.628 ; -12_Out_3.2@211.098,167.753 206.69,168.77 -12_Out_3.2@211.098,169.788 ; -12_Out_4.2 205.499,158.61 203.708,160.401 203.708,163.639 ; -12_Out_3.2 205.6,168.77 203.708,166.878 203.708,163.639
NetD21_K: D21.K R21.1 | length 7.3
  Bottom Layer w1: R21.1 82.55,220.091 83.82,218.821 D21.K
NetD22_K: D22.K R22.1 | length 7
  Bottom Layer w1: R22.1 82.55,206.248 83.82,204.978 D22.K
NetD23_K: D23.K R23.1 | length 6.7
  Bottom Layer w1: R23.1 82.55,192.405 83.82,191.135 D23.K
NetD24_K: D24.K R24.1 | length 9.6
  Bottom Layer w1: R24.1 82.169,170.942 83.82,172.593 ; 83.82,172.593 D24.K 83.82,172.593
NetD25_K: D25.K R25.1 | length 7.7
  Bottom Layer w1: D25.K 193.929,219.964 195.072,221.107 R25.1
NetD26_K: D26.K R26.1 | length 7
  Bottom Layer w1: D26.K 193.929,205.105 196.3,207.476 R26.1
NetD27_K: D27.K R27.1 | length 10.6
  Bottom Layer w1: D27.K 193.929,192.532 195.199,193.802 ; R27.1@198.332,193.802 195.199,193.802 ; R27.1 195.199,193.802
NetD28_K: D28.K R28.1 | length 9.2
  Bottom Layer w1: R28.1 195.707,172.593 193.929,174.371 ; 193.929,174.371 D28.K 193.929,174.371
pads on no net: J1.0 J1.5 J2.0 J2.5

## Polygon pours and split planes (outlines as drawn)
GND on Top Layer "Bottom Layer-No Net" (solid, pour order 6): 226.314,226.314 51.308,226.314 51.308,32.385 226.314,32.385 226.314,226.314

## Keep-outs
Keep-Out Layer:
  lines w0.254: 51.308,32.385 226.314,32.385 226.314,226.314 51.308,226.314 51.308,32.385

## Silkscreen, mask and mechanical layers (free items; w line width, h text height)
Top Overlay:
  text "GND" at 134.874,211.328 h1.52 r270
  text "-12" at 140.97,211.328 h2 r270
  text "GND" at 147.447,211.328 h1.52 r270
  text "+5" at 128.778,211.074 h2 r270
  text "GND" at 148.844,48.641 h2 r90
  text "GND" at 136.525,48.387 h2 r90
  text "+12" at 143.129,48.387 h2 r90
  text "+24" at 130.429,48.26 h2 r90
Bottom Overlay:
  text "GND" at 56.134,203.454 h1.52
  text "GND" at 217.424,203.327 h1.52
  text "GND" at 56.134,193.421 h1.52
  text "GND" at 217.424,193.04 h1.52
  text "GND" at 217.17,183.134 h1.52
  text "GND" at 56.134,182.626 h1.52
  text "GND" at 56.007,173.101 h1.52
  text "GND" at 217.424,172.974 h1.52
  text "GND" at 55.753,162.941 h1.52
  text "GND" at 217.297,162.433 h1.52
  text "GND" at 55.499,152.527 h1.52
  text "GND" at 217.424,152.4 h1.52
  text "GND" at 55.753,138.811 h1.52
  text "GND" at 217.297,138.557 h1.52
  text "GND" at 55.499,129.032 h1.52
  text "GND" at 218.313,128.524 h1.52
  text "GND" at 55.753,118.745 h1.52
  text "GND" at 217.932,118.491 h1.52
  text "GND" at 55.372,108.458 h1.52
  text "GND" at 217.424,108.077 h1.52
  text "GND" at 218.059,98.425 h1.52
  text "GND" at 55.88,98.044 h1.52
  text "GND" at 55.753,88.011 h1.52
  text "GND" at 217.17,88.011 h1.52
  text "GND" at 55.88,77.978 h1.52
  text "GND" at 217.678,77.851 h1.52
  text "GND" at 55.499,68.199 h1.52
  text "GND" at 217.678,67.564 h1.52
  text "GND" at 55.499,57.658 h1.52
  text "GND" at 217.297,57.277 h1.52
  text "GND" at 217.297,47.498 h1.52
  text "GND" at 55.499,47.371 h1.52

## Dimensions
114.3,188.749 to 93.3,188.749 on Mechanical 1
147.955,216.281 to 226.314,226.314 on Mechanical 1
114.3,215.877 to 163.322,217.045 on Mechanical 1
51.308,32.385 to 66.408,48.273 on Mechanical 1
226.314,226.314 to 51.308,226.314 on Mechanical 1
226.314,226.314 to 226.314,32.385 on Mechanical 1
211.214,48.374 to 226.314,32.385 on Mechanical 1
184.322,217.045 to 226.314,226.314 on Mechanical 1
51.308,226.314 to 93.3,215.877 on Mechanical 1
66.408,48.273 to 51.308,32.385 on Mechanical 1
211.214,48.374 to 226.314,32.385 on Mechanical 1
141.955,42.418 to 226.314,32.385 on Mechanical 1
66.408,209.436 to 51.308,226.314 on Mechanical 1
211.214,209.41 to 226.314,226.314 on Mechanical 1
59.309,220.218 to 51.308,226.314 on Mechanical 1
59.309,220.218 to 51.308,226.314 on Mechanical 1
218.313,38.481 to 226.314,32.385 on Mechanical 1
218.313,38.481 to 226.314,32.385 on Mechanical 1